# Altium PCB VS1003.PcbDoc
Units mil, origin at the board's own origin, x right, y up, seen from the top; angles counter-clockwise.
Board outline 6000 x 4000 mil, 2 copper layers (Top Layer, Bottom Layer); 26 components, 24 nets, 118 pads, 8 vias.
Unrouted connection lines stored in the file: 4.
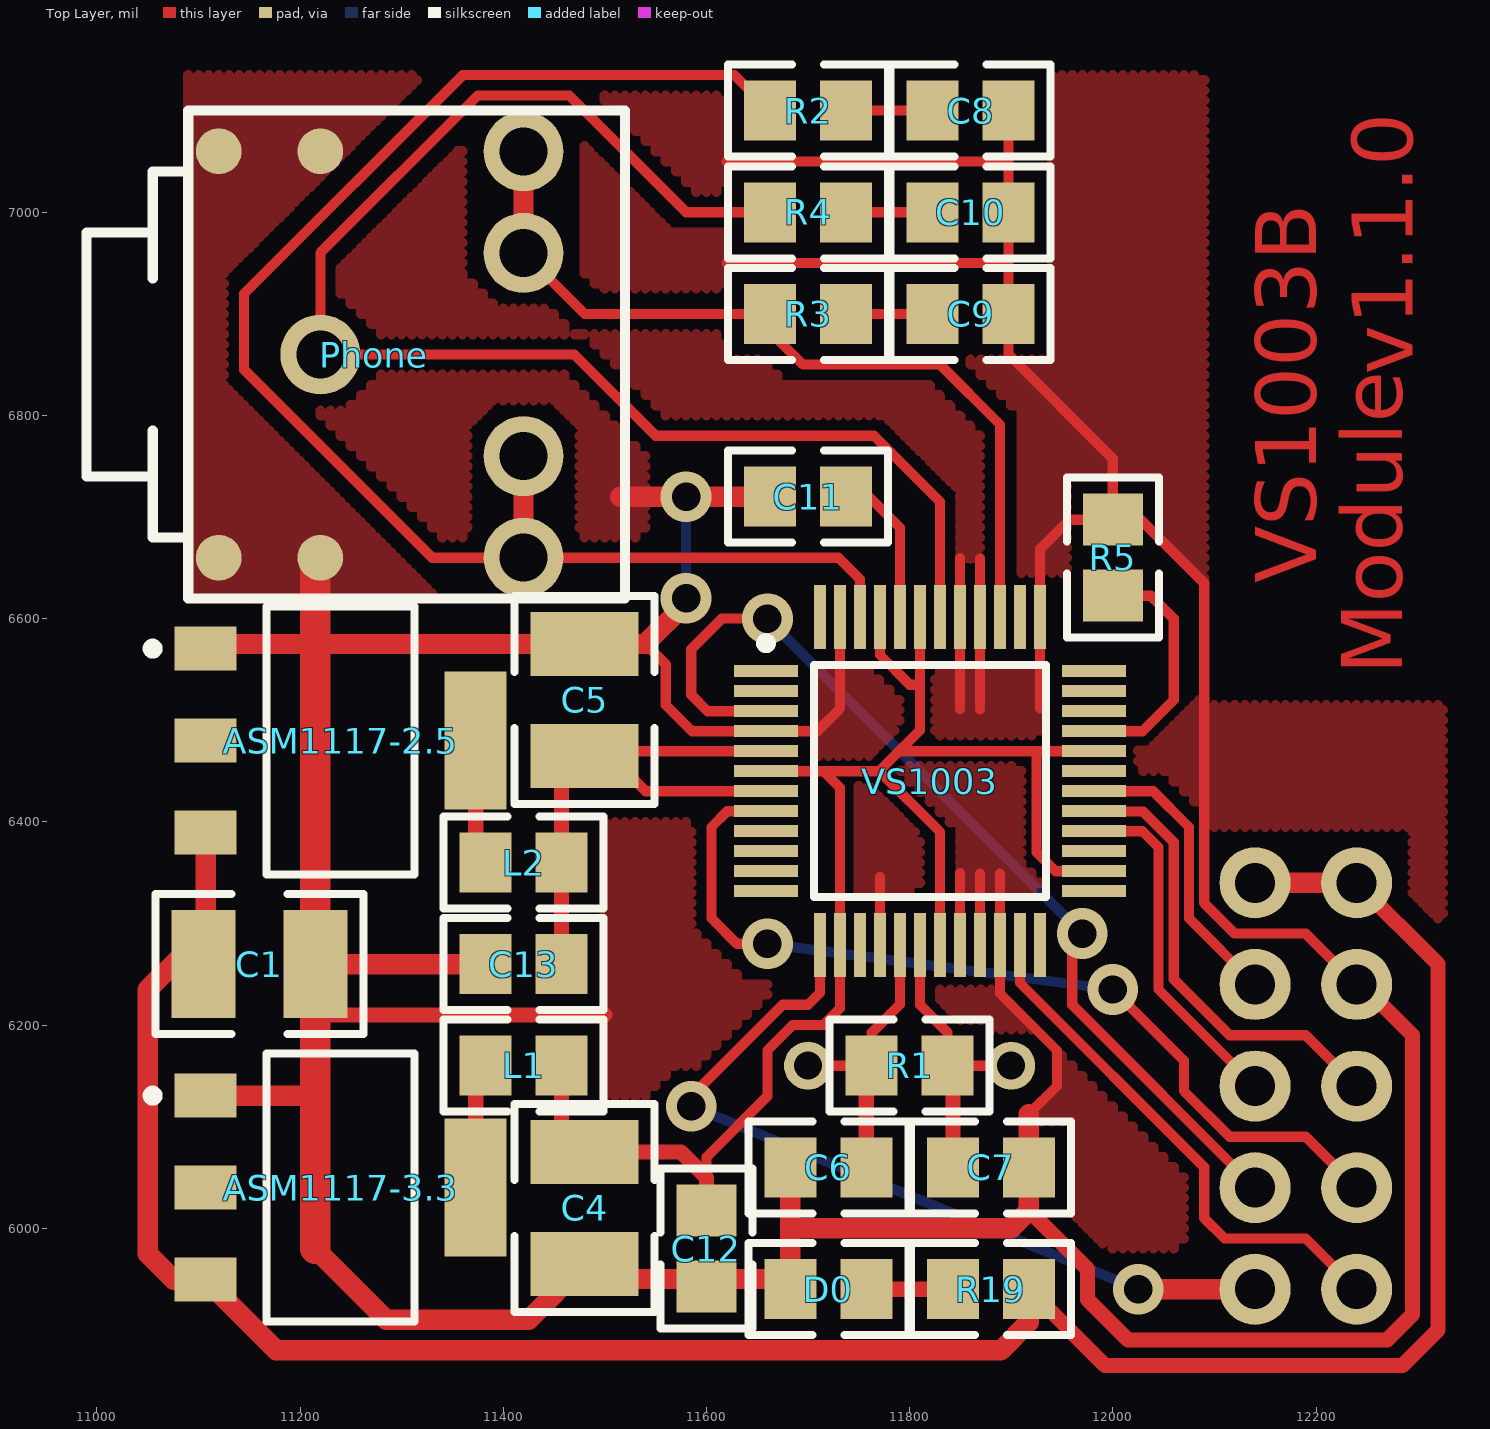
[diagram p0: Top Layer view]
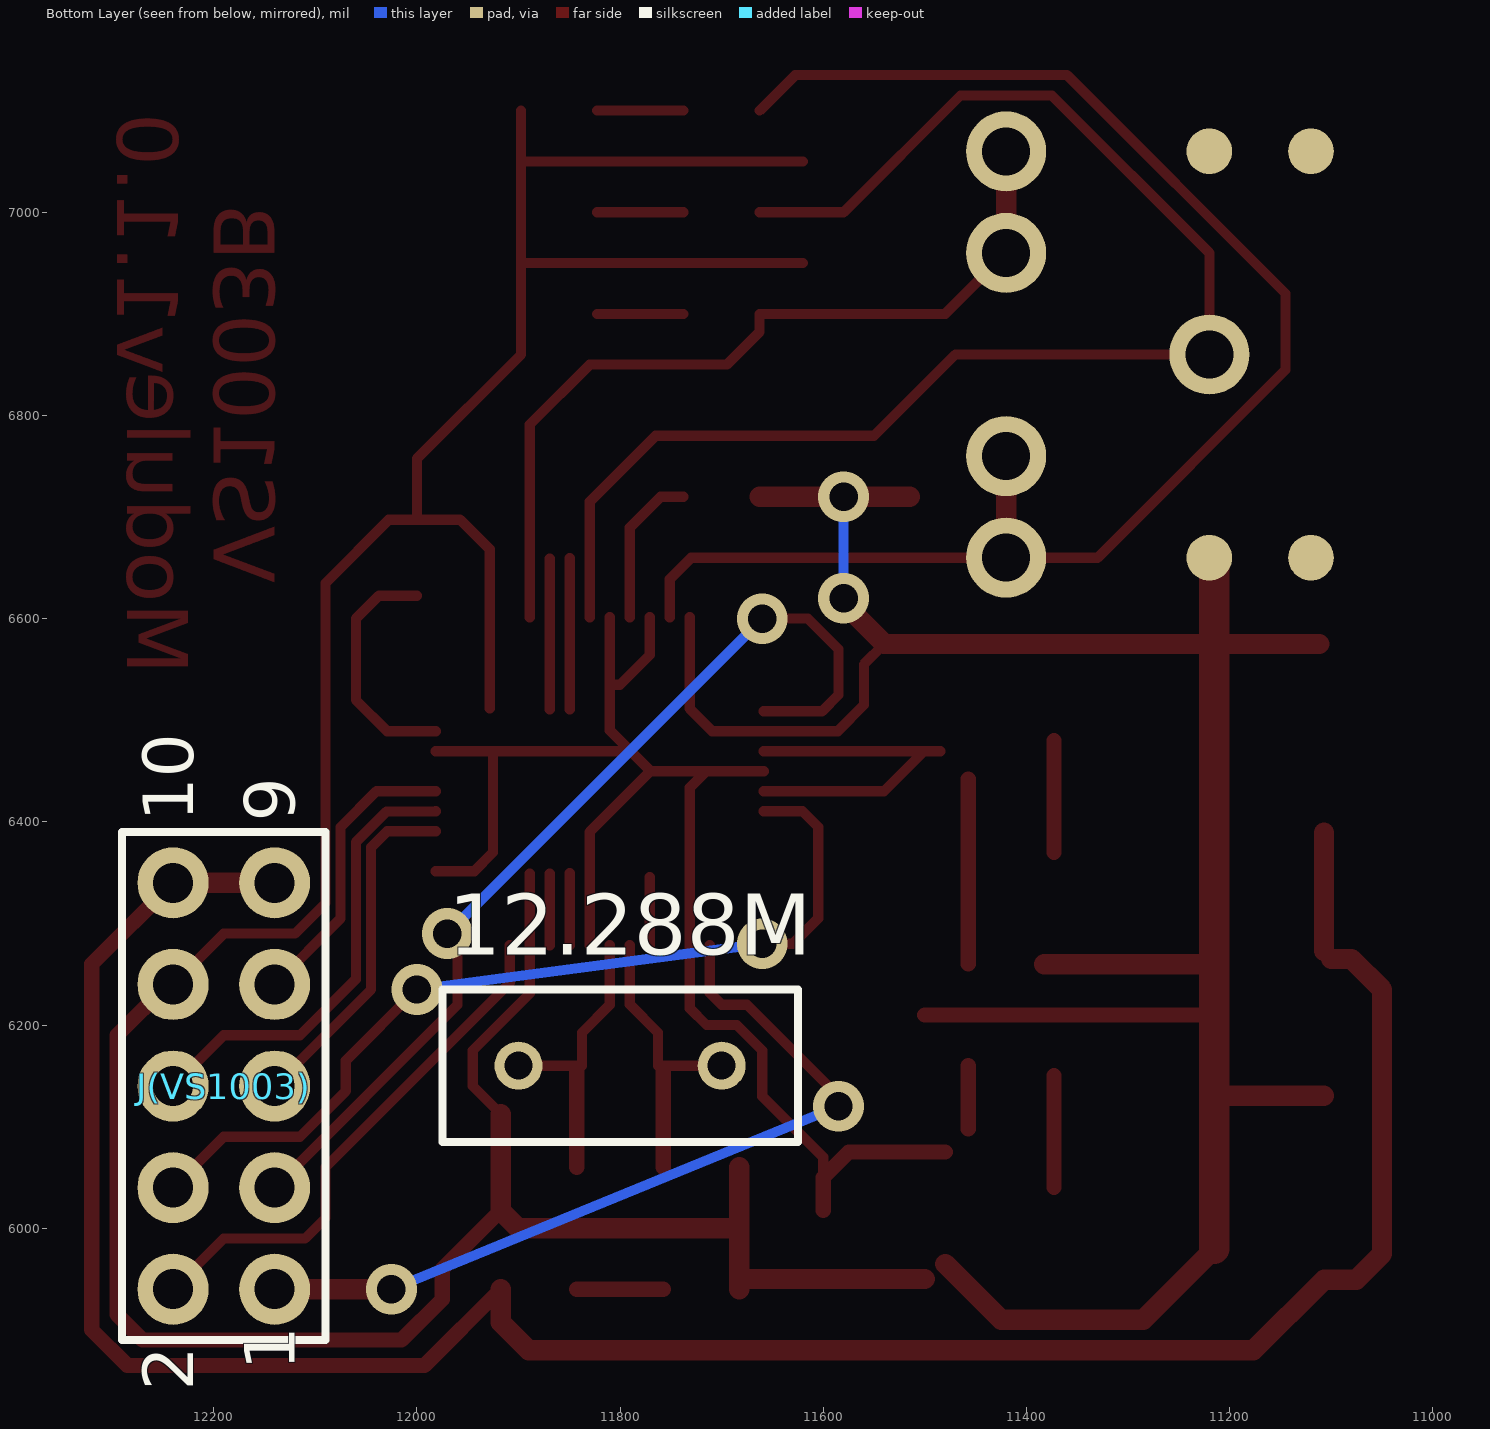
[diagram p1: Bottom Layer view, seen from below]

## Layer stack, top to bottom
Top Layer: signal copper 1.4
Dielectric: dielectric 12.6, FR-4, Dk 4.8
Bottom Layer: signal copper 1.4

## Board outline
1000,1000 7000,1000 7000,5000 1000,5000

## Design rules (kind name [scope] priority, off if disabled: settings)
Clearance [All] p1 off: gap=10
ComponentClearance [All] p1 off: gap=10 collisioncheckmode=0
FanoutControl Fanout_BGA [IsBGA] p1 off: bgadir=Out bgaviamode=Centered fanoutstyle=Auto fanoutdirection=Alternating viagrid=1 // Fanout_BGA (Default Rule)
FanoutControl Fanout_Default [All] p2 off: bgadir=Out bgaviamode=Centered fanoutstyle=Auto fanoutdirection=Alternating viagrid=1 // Fanout_Default (Default Rule)
FanoutControl Fanout_LCC [IsLCC] p3 off: bgadir=Out bgaviamode=Centered fanoutstyle=Auto fanoutdirection=Alternating viagrid=1 // Fanout_LCC (Default Rule)
FanoutControl Fanout_Small [(CompPinCount < 5)] p4 off: bgadir=Out bgaviamode=Centered fanoutstyle=Auto fanoutdirection=OutThenIn viagrid=1 // Fanout_Small (Default Rule)
FanoutControl Fanout_SOIC [IsSOIC] p5 off: bgadir=Out bgaviamode=Centered fanoutstyle=Auto fanoutdirection=Alternating viagrid=1 // Fanout_SOIC (Default Rule)
Height [All] p1 off: minheight=0 maxheight=1000 prefheight=500
HoleSize [All] p1 off: absolutevalues=TRUE maxlimit=100 minlimit=1 maxpercent=80.000 minpercent=20.000
LayerPairs [All] p1 off: enforce=TRUE
PasteMaskExpansion [All] p1 off: expansion=0
PlaneClearance [All] p1 off: clearance=20
PlaneConnect [All] p1 off: planeconnectstyle=Relief reliefexpansion=20 reliefentries=4 reliefconductorwidth=10 reliefairgap=10
PolygonConnect [All] p1 off: connectstyle=Relief reliefconductorwidth=10 reliefentries=4 polygonreliefangle="90 Angle"
RoomDefinition VS1003 [InComponentClass('VS1003')] p1 off: confinementstyle=ConfineIn formatcopy=TRUE outline 0,0 2000,0 2000,1000 0,1000
RoutingCorners [All] p1 off: cornerstyle=45-Degree minsetback=100 maxsetback=100
RoutingLayers [All] p1 off: top layer=Horizontal bottom layer=Vertical
RoutingPriority [All] p1 off: routingpriority=0
RoutingTopology [All] p1 off: topology=Shortest
RoutingVias [All] p1 off: holewidth=28 width=50 viastyle="Through Hole" minholewidth=28 minwidth=50 maxholewidth=28 maxwidth=50
ShortCircuit [All] p1 off: allowed=FALSE
SolderMaskExpansion [All] p1 off: expansion=4
TestPointUsage [All] p1 off: valid=0 allowmultiple=FALSE
Testpoint [All] p1 off: side=15 testpointundercomponent=TRUE minsize=40 maxsize=100 preferedsize=60 minholesize=0 maxholesize=40 preferedholesize=32 testpointgrid=1 style=1023 order=-539222988
UnRoutedNet [All] p1 off:
Width [All] p1 off: maxlimit=10 minlimit=10 preferedwidth=10

## Components (designator, comment, footprint, x,y, rotation, side; value= is the part's Value field where it differs from the comment)
12.288M "XTAL" RAD-0.2 11800,6160 r0 bottom
ASM1117-2.5 "REG1117-5" ZZ311 11240,6480 r270 top
ASM1117-3.3 "REG1117-5" ZZ311 11240,6040 r270 top
C1 "Cap Pol3" CR3225-1210 11160,6260 r0 top
C4 "Cap Pol3" CR3225-1210 11480,6020 r270 top
C5 "Cap Pol3" CR3225-1210 11480,6520 r90 top
C6 "Cap Semi" CR2012-0805 11720,6060 r0 top
C7 "Cap Semi" CR2012-0805 11880,6060 r0 top
C8 "Cap Semi" CR2012-0805 11860,7100 r180 top
C9 "Cap Semi" CR2012-0805 11860,6900 r180 top
C10 "Cap Semi" CR2012-0805 11860,7000 r180 top
C11 "Cap Semi" CR2012-0805 11700,6720 r0 top
C12 "Cap Semi" CR2012-0805 11600,5980 r90 top
C13 "Cap Semi" CR2012-0805 11420,6260 r0 top
D0 "LED2" R2012-0805 11720,5940 r180 top
J(VS1003) "Header 5X2" HDR2X5 12140,5940 r90 bottom
L1 "Inductor" R2012-0805 11420,6160 r180 top
L2 "Inductor" R2012-0805 11420,6360 r180 top
Phone "Earphone" Earphone 11220,6860 r90 top
R1 "Res3" R2012-0805 11800,6160 r180 top
R2 "Res3" R2012-0805 11700,7100 r180 top
R3 "Res3" R2012-0805 11700,6900 r180 top
R4 "Res3" R2012-0805 11700,7000 r180 top
R5 "Res3" R2012-0805 12000,6660 r90 top
R19 "Res3" R2012-0805 11880,5940 r0 top
VS1003 "VS1003B" TQFP-48 11820,6440 r0 top

## Footprints (in the part's own frame and the unit in brackets; to place one, negate y for a bottom-side part, rotate by r counter-clockwise, add the part's x,y. Pads: shape width x height; smd on the part's side, far side on the other; paste and mask are expansions set on the pad)
CR2012-0805 [mm]
  rect 1.3x1.5 smd: 1(-0.95,0) 2(0.95,0)
  silkscreen extent -2,-1.15 2,1.15
CR3225-1210 [mm]
  rect 1.6x2.7 smd: 1(-1.4,0) 2(1.4,0)
  silkscreen extent -2.6,-1.75 2.6,1.75
Earphone [mm] "Earphone"
  round 1.143 all layers, no hole: 0(-5.08,0) 0(-5.08,2.54) 0(5.08,0) 0(5.08,2.54)
  round 0 all layers, no hole: 0(0,-5.207)
  round 2 hole 1.2: 1(-5.08,-5.08) 2(-2.54,-5.08) 3(2.54,-5.08) 4(5.08,-5.08) 5(0,0)
  silkscreen extent -6.1,-7.62 6.1,5.84
HDR2X5 [mil] "Connector; Header; 5x2 Position"
  round 70 hole 39.37: 1(0,0) 2(0,100) 3(100,0) 4(100,100) 5(200,0) 6(200,100) 7(300,0) 8(300,100) 9(400,0) 10(400,100)
  silkscreen extent -50,-50 450,150
R2012-0805 [mm]
  rect 1.3x1.5 smd: 1(-0.95,0) 2(0.95,0)
  silkscreen extent -2,-1.15 2,1.15
RAD-0.2 [mm]
  round 1.2 hole 0.7: 1(-2.54,0) 2(2.54,0)
  silkscreen extent -4.44,-1.91 4.44,1.91
TQFP-48 [mm] "QFP; 48 Leads; Body 7 x 7 mm; Pitch 0.5 mm"
  rect 1.6x0.3 smd: 1(-4.1,2.75) 2(-4.1,2.25) 3(-4.1,1.75) 4(-4.1,1.25) 5(-4.1,0.75) 6(-4.1,0.25) 7(-4.1,-0.25) 8(-4.1,-0.75) 9(-4.1,-1.25) 10(-4.1,-1.75) 11(-4.1,-2.25) 12(-4.1,-2.75) 25(4.1,-2.75) 26(4.1,-2.25) 27(4.1,-1.75) 28(4.1,-1.25) 29(4.1,-0.75) 30(4.1,-0.25) 31(4.1,0.25) 32(4.1,0.75) 33(4.1,1.25) 34(4.1,1.75) 35(4.1,2.25) 36(4.1,2.75)
  rect 0.3x1.6 smd: 13(-2.75,-4.1) 14(-2.25,-4.1) 15(-1.75,-4.1) 16(-1.25,-4.1) 17(-0.75,-4.1) 18(-0.25,-4.1) 19(0.25,-4.1) 20(0.75,-4.1) 21(1.25,-4.1) 22(1.75,-4.1) 23(2.25,-4.1) 24(2.75,-4.1) 37(2.75,4.1) 38(2.25,4.1) 39(1.75,4.1) 40(1.25,4.1) 41(0.75,4.1) 42(0.25,4.1) 43(-0.25,4.1) 44(-0.75,4.1) 45(-1.25,4.1) 46(-1.75,4.1) 47(-2.25,4.1) 48(-2.75,4.1)
  silkscreen extent -4.22,-2.9 2.9,3.57
ZZ311 [mm] "SOT-223/SC-73; 4 Leads; Body 6.7 x 7.3 mm, inc. leads (LxW max)"
  rect 1.1x1.55 smd: 1(-2.3,-3.375) 2(0,-3.375) 3(2.3,-3.375)
  rect 3.45x1.55 smd: 4(0,3.375)
  silkscreen extent -3.35,-4.82 3.35,1.85

## Part data
12.288M: "Crystal Oscillator"
ASM1117-2.5 ASM1117-3.3: "800mA and 1A Low Dropout Positive Regulator 2.85V, 3.3V, 5V, and Adjustable"
C1 C4 C5: "Polarized Capacitor (Surface Mount)"
C6 C7 C8 C9 C10 C11 C12 C13: "Capacitor (Semiconductor SIM Model)"
D0: "Typical RED, GREEN, YELLOW, AMBER GaAs LED"
J(VS1003): "Header, 5-Pin, Dual row"
R1 R2 R3 R4 R5 R19: "Resistor"

## Via types
v1: diameter 50, hole 28, Top Layer to Bottom Layer, 8 vias

## Nets (pads, with @x,y where several pads share a name; then routed paths per layer and width w, separated by ;. In a path a pad name is that pad's centre, name@x,y a point inside that pad or via, vN(x,y) a via of type N, cw(c..) or ccw(c..) an arc to the next point about the centre after c; other vN are vias at no path point)
2.5V: ASM1117-2.5.4 L2.2 | length 110.3
  Top Layer w15: L2.2@11372.87,6369.72 ASM1117-2.5.4
3.3V: ASM1117-3.3.4 L1.2 | length 110.3
  Top Layer w15: ASM1117-3.3.4 L1.2@11372.87,6150.28
AVDD: C4.1 C12.2 L1.1 VS1003.6 VS1003.14 VS1003.19 VS1003.26 VS1003.32 VS1003.38 VS1003.43 VS1003.45 | length 1623
  Top Layer w10: 11600,6050 11600,6070 11660,6130 11660,6175 11685,6200 11715,6200 11731.42,6216.42 11731.42,6433.58 11715.16,6449.84 ; VS1003.6 11770.16,6449.84 11829.84,6390.16 VS1003.19 ; 11769.84,6449.84 11810.16,6490.16 VS1003.43 ; VS1003.45 11770.79,6564.21 11800,6535 11810.16,6535 ; 11790.47,6469.53 VS1003.32 ; 11925,6469.53 11925,6370 11943.58,6351.42 VS1003.26
  Top Layer w15: C4.1@11457.4,6097.72 L1.1 ; C4.1 11574.88,6075.12 11600,6050 C12.2
CVDD: C5.1 C13.2 L2.1 VS1003.5 VS1003.7 VS1003.24 VS1003.31 | length 530.3
  Top Layer w10: C5.1@11484.65,6469.53 VS1003.5 ; C5.1@11500.79,6469.53 11540.16,6430.16 VS1003.7
  Top Layer w15: C13.2 L2.1 C5.1@11457.4,6442.28
GND: ASM1117-2.5.1 ASM1117-3.3.1 C1.2 C4.2 C5.2 C6.1 C7.2 C8.1 C9.1 C10.1 C11.1 C12.1 C13.1 D0.2 J(VS1003).8 R5.2 VS1003.4 VS1003.16 VS1003.20 VS1003.21 VS1003.22 VS1003.37 VS1003.40 VS1003.41 VS1003.47 | length 6713.6
  Top Layer w10: C4.2@11479.88,5964.88 C4.2 ; 11539.88,6575.12 11560,6555 11560,6515 11585.79,6489.21 11709.21,6489.21 11731.42,6511.42 VS1003.47 ; v1@11580,6615.24 v1(11580,6620) ; 11620,6950 11897.4,6950 ; 11620,7050 11897.4,7050 ; VS1003.16 11770.79,6345.79 ; VS1003.20 11849.53,6349.53 ; 11849.53,6510.47 11849.53,6659.53 ; VS1003.21 11869.21,6349.21 ; 11869.21,6510.79 11869.21,6659.21 ; 11888.9,6348.9 11888.9,6231.1 11945,6175 11945,6140 11917.4,6112.4 ; C8.1 11897.4,6860 12000,6757.4 R5.2 ; 11928.27,6511.73 11928.27,6668.27 11957.4,6697.4 12027.6,6697.4 12090,6635 12090,6320 12120,6290 12190,6290 12240,6240 12245,6240
  Top Layer w15: C1.2@11215.12,6210 11500,6210 ; 11917.4,6017.4 11975,5960 11975,5930 12015,5890 12270,5890 12295,5915 12295,6190 12245,6240
  Top Layer w20: ASM1117-3.3.1 11214.57,6130.55 ; ASM1117-2.5.1@11111.69,6575.12 C5.2 11539.88,6575.12 v1@11580,6615.24 ; 11215.12,5979.88 11285,5910 11425,5910 C4.2@11479.88,5964.88 ; C1.2 C13.1 ; C4.2@11500,5950 D0.2@11682.6,5950 ; 11515,6720 v1(11580,6720) C11.1 ; D0.2 C6.1 ; 11682.6,6000 11900,6000 11917.4,6017.4 11917.4,6112.4
  Top Layer w30: 11215.12,5979.88 11215.12,6575 11215.12,6649.88
  Bottom Layer w10: v1(11580,6620) v1(11580,6720)
Net12.288M_1: 12.288M.1 C6.2 R1.2 VS1003.17 | length 287.5
  Top Layer w10: 12.288M.1 R1.2 11762.6,6192.6 11790.47,6220.47 VS1003.17
  Top Layer w15: C6.2 R1.2@11757.4,6154.8
Net12.288M_2: 12.288M.2 C7.1 R1.1 VS1003.18 | length 287.3
  Top Layer w10: VS1003.18 11810.16,6219.84 11837.4,6192.6 R1.1 12.288M.2
  Top Layer w15: C7.1 R1.1@11842.6,6154.8
NetC8_2: C8.2 R2.1 | length 85.2
  Top Layer w10: R2.1 C8.2
NetC9_2: C9.2 R3.1 | length 85.2
  Top Layer w10: R3.1 C9.2
NetC10_2: C10.2 R4.1 | length 85.2
  Top Layer w10: R4.1 C10.2
NetC11_2: C11.2 VS1003.44 | length 153.8
  Top Layer w10: C11.2 11760,6720 11790.47,6689.53 VS1003.44
NetD0_1: D0.1 R19.1 | length 85.2
  Top Layer w15: D0.1 R19.1
NetJ(VS1003)_1: J(VS1003).1 VS1003.13 | length 816.1
  Top Layer w10: v1(11585,6120) 11585,6130 11675,6220 11700,6220 11711.73,6231.73 VS1003.13
  Top Layer w20: v1(12025,5940) 12140,5940
  Bottom Layer w10: v1(11585,6120) v1(12025,5940)
NetJ(VS1003)_2: J(VS1003).2 VS1003.23 | length 522.7
  Top Layer w10: VS1003.23 11908.58,6241.42 12090,6060 12090,6010 12110,5990 12190,5990 12240,5940
NetJ(VS1003)_3: J(VS1003).3 VS1003.3 | length 979.8
  Top Layer w10: VS1003.3 11601.1,6508.9 11585,6525 11585,6570 11615,6600 v1(11660,6600) ; v1(11970,6290) 11960,6280 11960,6220 12140,6040
  Bottom Layer w10: v1(11660,6600) v1(11970,6290)
NetJ(VS1003)_4: J(VS1003).4 VS1003.8 | length 896.7
  Top Layer w10: VS1003.8 11620.47,6410.47 11605,6395 11605,6305 11630,6280 v1(11660,6280) ; v1(12000,6235) 12070,6165 12070,6135 12115,6090 12190,6090 12240,6040
  Bottom Layer w10: v1(11660,6280) v1(12000,6235)
NetJ(VS1003)_5: J(VS1003).5 VS1003.28 | length 344.5
  Top Layer w10: VS1003.28 12029.21,6390.79 12045,6375 12045,6235 12140,6140
NetJ(VS1003)_6: J(VS1003).6 VS1003.29 | length 449.5
  Top Layer w10: VS1003.29 12030,6410 12060,6380 12060,6245 12115,6190 12190,6190 12240,6140
NetJ(VS1003)_7: J(VS1003).7 VS1003.30 | length 290.1
  Top Layer w10: VS1003.30 12039.84,6430.16 12075,6395 12075,6305 12140,6240
NetPhone_1: Phone.1 Phone.2 R2.2 VS1003.46 | length 1525.1
  Top Layer w10: R2.2 11627.6,7135 11360,7135 11145,6920 11145,6845 11330,6660 11730,6660 11751.1,6638.9 VS1003.46
  Top Layer w20: Phone.1 Phone.2
NetPhone_3: Phone.3 Phone.4 R3.2 VS1003.39 | length 838.9
  Top Layer w10: Phone.3 11480,6900 R3.2 11662.6,6882.4 11695,6850 11830,6850 11888.9,6791.1 VS1003.39
  Top Layer w20: Phone.3 Phone.4
NetPhone_5: Phone.5 R4.2 VS1003.42 | length 1438
  Top Layer w10: R4.2 11580,7000 11465,7115 11375,7115 11220,6960 Phone.5 11470,6860 11550,6780 11765,6780 11829.84,6715.16 VS1003.42
NetR5_1: R5.1 VS1003.33 | length 240.7
  Top Layer w10: VS1003.33 12029.21,6489.21 12060,6520 12060,6600 12037.4,6622.6 R5.1
VCC: ASM1117-2.5.3 ASM1117-3.3.3 C1.1 J(VS1003).9 J(VS1003).10 R19.2 | length 2411
  Top Layer w15: R19.2 11992.4,5865 12285,5865 12320,5900 12320,6260 12240,6340
  Top Layer w20: C1.1@11100,6265 11080,6265 11050,6235 11050,5975 11075.55,5949.45 ASM1117-3.3.3 11176.58,5880 11890,5880 11917.4,5907.4 R19.2 ; C1.1@11107.13,6272.87 ASM1117-2.5.3 ; 12140,6340 12240,6340
pads on no net: ASM1117-2.5.2 ASM1117-3.3.2 Phone.0 VS1003.1 VS1003.2 VS1003.9 VS1003.10 VS1003.11 VS1003.12 VS1003.15 VS1003.25 VS1003.27 VS1003.34 VS1003.35 VS1003.36 VS1003.48

## Polygon pours and split planes (outlines as drawn)
GND on Top Layer (hatched 90Degree grid 0 track 10): 11710,6550 11760,6550 11785,6525 11790,6520 11790,6495 11760,6465 11710,6465
GND on Top Layer (hatched 90Degree grid 0 track 10): 11825,6550 11825,6485 11930,6485 11930,6550
GND on Top Layer (hatched 90Degree grid 0 track 10): 11930,6330 11849.53,6330 11849.53,6390 11794.53,6445 11800,6450.47 11795,6445.47 11790.47,6450 11795.47,6455 11910,6455 11910,6360 11930,6340
GND on Top Layer (hatched 90Degree grid 0 track 10): 11750,6330 11810,6330 11810,6385 11765,6430 11760,6435 11750,6435
GND on Top Layer (hatched 90Degree grid 0 track 10): 11849.53,6659.53 11869.21,6659.53 11869.21,6780 11815,6834.21 11819.21,6830 11680,6830 11655,6855 11620,6855 11620,6880 11470,6880 11445,6905 11395,6905 11360,6940 11360,7065 11240,6945 11240,6920 11280,6880 11480,6880 11560,6800 11775,6800 11849.53,6725.47
GND on Top Layer (hatched 90Degree grid 0 track 10): 11620,6980 11620,6925 11495,6925 11480,6940 11480,7065 11565,6980
GND on Top Layer (hatched 90Degree grid 0 track 10): 11500,7115 11620,7115 11620,7020 11590,7020 11495,7115
GND on Top Layer (hatched 90Degree grid 0 track 10): 11540,6755 11540,6680 11475,6680 11475,6790 11450,6815 11390,6815 11370,6795 11365,6790 11365,6680 11340,6680 11215,6805 11245,6805 11280,6840 11460,6840 11540,6760
GND on Top Layer (hatched 90Degree grid 0 track 10): 11500,6400 11585,6400 11585,6295 11635,6245 11640,6240 11660,6240 11660,6230 11590,6160 11570,6160 11540,6130 11500,6130
GND on Top Layer (hatched 90Degree grid 0 track 10): 11090,6620 11335,6620 11125,6830 11125,6940 11320,7135 11090,7135
GND on Top Layer (hatched 90Degree grid 0 track 10): 11940,7135 12050,7135 12050,6740 11955,6740 11955,6645 11910,6645 11910,6800 11855,6855 11940,6855
GND on Top Layer (hatched 90Degree grid 0 track 10): 12025,6470 12025,6450 12050,6450 12090,6410 12090,6525 12040,6475 12035,6470
GND on Top Layer (hatched 90Degree grid 0 track 10): 12090,6635 12090,7135 12050,7135 12050,6676.17 12090,6636.17
GND on Top Layer (hatched 90Degree grid 0 track 10): 12090,6395 12325,6395 12325,6515 12090,6515
GND on Top Layer (hatched 90Degree grid 0 track 10): 12325,6395 12325,6300 12295,6330 12295,6395
GND on Top Layer (hatched 90Degree grid 0 track 10): 11830,6235 11888.9,6235 11888.9,6231.1 11924.51,6195.49 11880,6195.49 11880,6205 11850,6205 11830,6225
GND on Top Layer (hatched 90Degree grid 0 track 10): 11945,6175 12070,6050 12070,5980 11995,5980 11960,6015 11960,6105 11917.4,6105 11917.4,6112.4 11945,6140

## Other copper
Top Layer:
  text "v1.1.0" at 12295,6840 h60 r90
  text "VS1003B" at 12200,6635 h60 r90
  text "Module" at 12285,6545 h60 r90

## Text inside footprints (layer, text, board x,y; h text height)
J(VS1003): Bottom Overlay "2" at 12220,5840 h50 r270; Bottom Overlay "1" at 12120,5860 h50 r270; Bottom Overlay "9" at 12120,6400 h50 r270; Bottom Overlay "10" at 12220,6400 h50 r270